# Altium PCB LCDTestor_LPC1788 - 副本.PcbDoc
Units mm, origin at the board's own origin, x right, y up, seen from the top; angles counter-clockwise.
Board outline 152.4 x 101.6 mm, 2 copper layers (Top Layer, Bottom Layer); 160 components, 269 nets, 828 pads, 23 vias.
Unrouted connection lines stored in the file: 488.
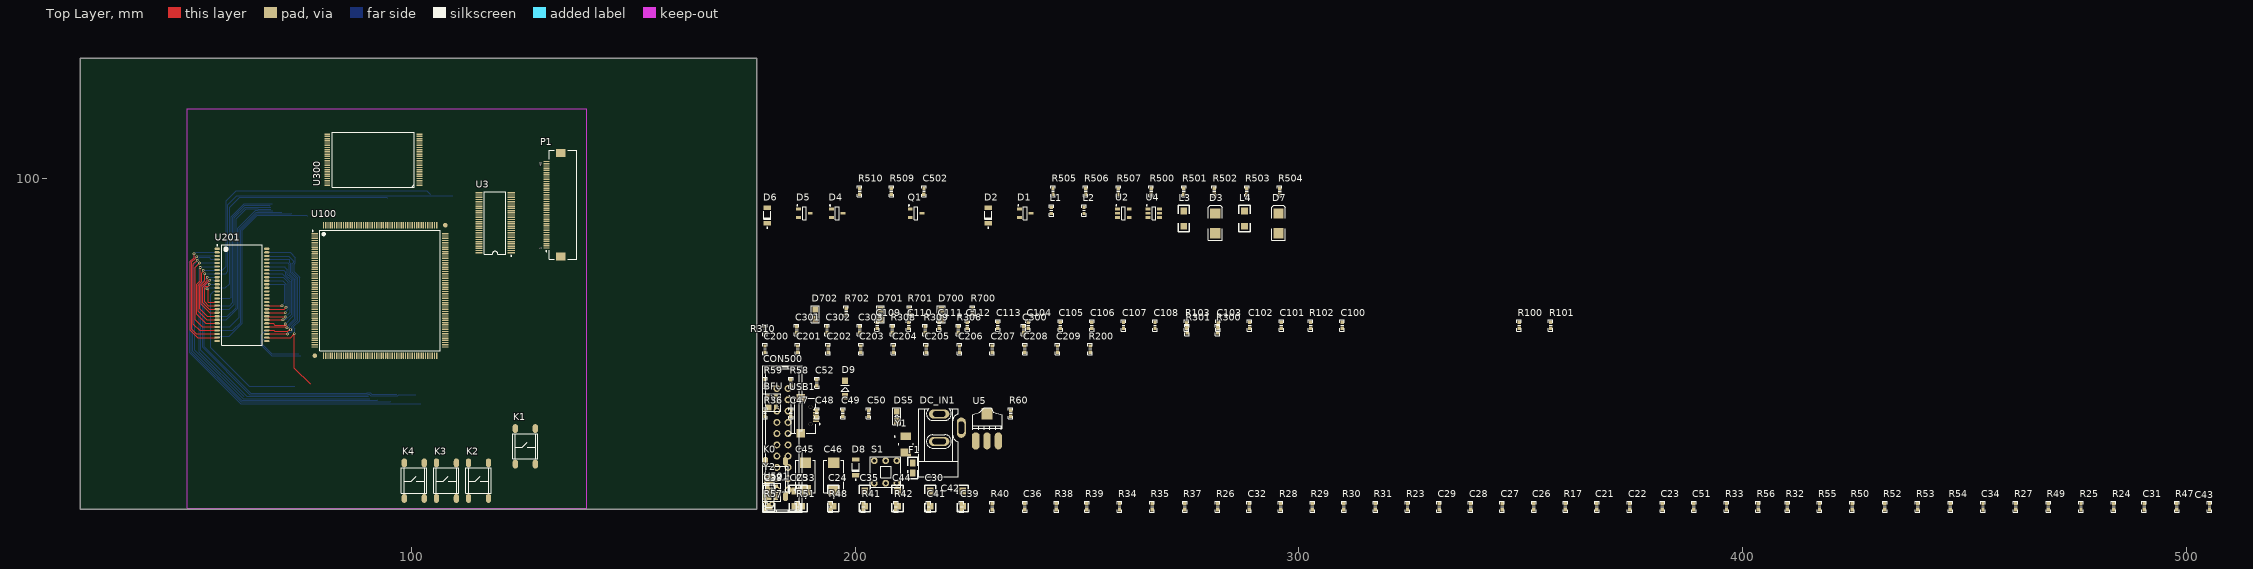
[diagram p0: Top Layer view]
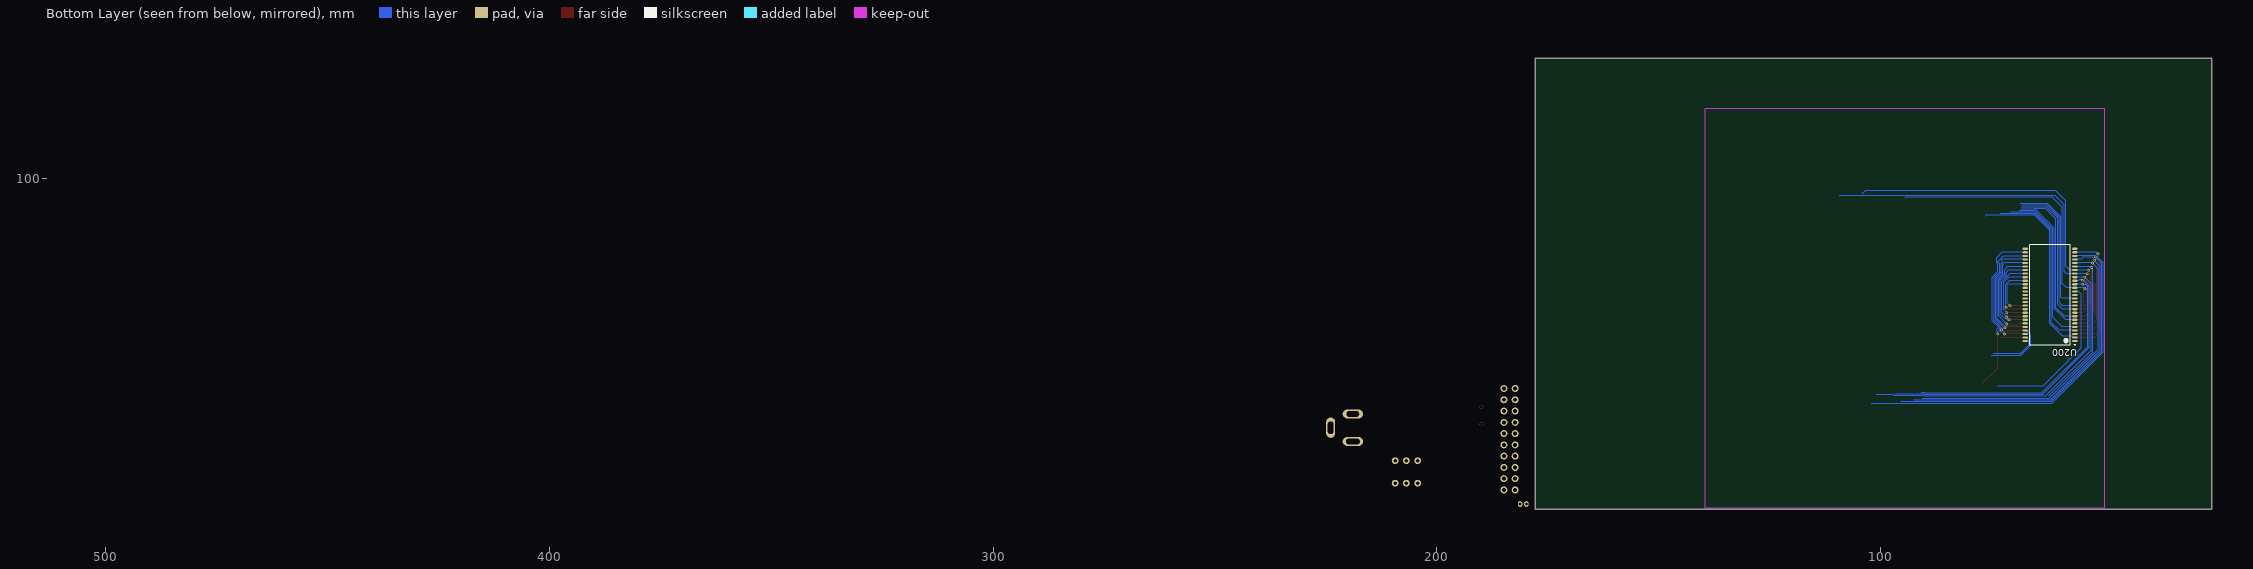
[diagram p1: Bottom Layer view, seen from below]

## Layer stack, top to bottom
Top Layer: signal copper 0.0356
Dielectric: dielectric 0.32, FR-4, Dk 4.8
Bottom Layer: signal copper 0.0356

## Board outline
25.4,25.4 177.8,25.4 177.8,127 25.4,127

## Design rules (kind name [scope] priority, off if disabled: settings)
Clearance [All] p1: gap=0.178
DiffPairsRouting [All] p1: maxlimit=0.254 minlimit=0.254 mostfreqgap=0.254 maxuncoupledlength=12.7
PolygonConnect [All] p1: connectstyle=Relief reliefconductorwidth=0.254 reliefentries=4 polygonreliefangle="90 Angle"
RoutingVias [All] p1: holewidth=0.3 width=0.6 viastyle="Through Hole" minholewidth=0.3 minwidth=0.6 maxholewidth=0.3 maxwidth=0.6
SilkscreenOverComponentPads [All] p1: minsilkscreentomaskgap=0.254
SolderMaskExpansion [All] p1: expansion=0.102
Width [All] p1: maxlimit=1.524 minlimit=0.127 preferedwidth=0.254
26 further rules are at their usual default settings.

## Classes and differential pairs
component class 11)KEY,LED: D700 D701 D702 K1 K2 K3 K4 R700 R701 R702
component class 07)Power,JTAG,RESET: C45 C46 C47 C48 C49 C50 C502 CON500 CT500 CT501 CT502 CT503 D8 D500 D501 DC_IN1 DS5 DW500 DW501 DW502 DW503 F1 K0 K500 R36 R60 R500 R501 R502 R503 R504 R505 R506 R507 R509 R510 S1 TP500 TP501 TP502 TP503 U5 U500 U501 U502
component class 05)NorFlash,NandFlash: C300 C301 C302 C303 JP300 R300 R301 R306 R308 R309 R310 U300 U301 U302
component class 06)LCD: C21 C22 C23 C24 C25 C26 C27 C28 C29 C30 C31 C32 C33 C34 C35 C36 C37 C38 C39 C41 C42 C43 C44 C51 C400 C402 C404 C406 C411 C414 C418 C420 C422 D1 D2 D3 D4 D5 D6 D7 L1 L2 L3 L4 P1 Q1 R17 R23 R24 R25 R26 R27 R28 R29 R30 R31 R32 R33 R34 R35 R37 R38 R39 R40 R41 R42 R47 R48 R49 R50 R51 R52 R53 R54 R55 R56 R57 U2 U3 U4
component class 04)SDRAM: C200 C201 C202 C203 C204 C205 C206 C207 C208 C209 C304 C305 C306 C307 C308 C309 JP1 R8 R9 R10 R11 R12 R13 R14 R15 R16 R200 U6 U200 U201 VD6 VD7
net class D[31..0]: D0 D1 D2 D3 D4 D5 D6 D7 D8 D9 D10 D11 D12 D13 D14 D15 D16 D17 D18 D19 D20 D21 D22 D23 D24 D25 D26 D27 D28 D29 D30 D31 D500 D501 D502 D503 D504 D505 D506
net class A[23..0]: A0 A1 A2 A3 A4 A5 A6 A7 A8 A9 A10 A11 A12 A13 A14 A15 A16 A17 A18 A19 A20 A21 A22 A23
component class 03)CPU-3: C100 C101 C102 C103 C104 C105 C106 C107 C108 C109 C110 C111 C112 C113 C210 C211 C212 C213 P0_5 R100 R101 R102 R103 R201 R202 R203 VD2 VD3 VD4 X1 Y1 Y2
component class 01)CPU-1: U100
net class VD[23..0]: VD2 VD3 VD4 VD5 VD6 VD7 VD10 VD11 VD12 VD13 VD14 VD15 VD18 VD19 VD20 VD21 VD22 VD23
component class "10)USB HOST,USB Device,": BFU C52 D9 R58 R59 USB1
differential pair RXIN3: +RXIN3_P -RXIN3_N
differential pair RXIN2: +RXIN2_P -RXIN2_N
differential pair RXIN1: +RXIN1_P -RXIN1_N
differential pair RXIN0: +RXIN0_P -RXIN0_N
differential pair RXCLKIN: +RXCLKIN_P -RXCLKIN_N
differential pair USB_D: +USB_D_P -USB_D_N

## Components (designator, comment, footprint, x,y, rotation, side; value= is the part's Value field where it differs from the comment)
BFU "SP0503" SOT143 181.229,49.403 r0 top
C21 "104" 0603P 367.157,25.908 r90 top
C22 "104" 0603P 374.523,25.908 r90 top
C23 "104" 0603P 381.889,25.908 r90 top
C24 "10uF/25V" 1206 195.072,26.035 r90 top
C25 "10uF/25V" 1206 186.436,26.035 r90 top
C26 "104" 0603P 352.933,25.908 r90 top
C27 "104" 0603P 345.821,25.908 r90 top
C28 "104" 0603P 338.709,25.908 r90 top
C29 "104" 0603P 331.597,25.908 r90 top
C30 "10uF/25V" 1206 216.916,26.035 r90 top
C31 "104" 0603P 490.474,25.908 r90 top
C32 "104" 0603P 288.798,25.908 r90 top
C33 "10uF/25V" 1206 187.96,26.035 r90 top
C34 "104" 0603P 454.152,25.908 r90 top
C35 "2.2uF/25V" 1206 202.184,26.035 r90 top
C36 "104" 0603P 238.252,25.908 r90 top
C37 "10uF/25V" 1206 180.594,26.035 r90 top
C38 "10uF/25V" 1206 180.594,26.035 r90 top
C39 "104" 0603P 224.028,25.908 r90 top
C41 "104" 0603P 216.535,25.908 r90 top
C42 "10uF/25V" 1206 224.282,26.035 r90 top
C43 "104" 0603P 505.206,25.908 r90 top
C44 "2.2uF/25V" 1206 209.55,26.035 r90 top
C45 "Cap Tantalum" 7343 188.849,32.766 r90 top
C46 "Cap Tantalum" 7343 195.199,32.766 r90 top
C47 "22uF" 0603P 185.547,46.99 r90 top
C48 "22uF" 0603P 191.389,46.99 r90 top
C49 "104" 0603P 197.231,46.99 r90 top
C50 "104" 0603P 203.073,46.99 r90 top
C51 "104" 0603P 389.001,25.908 r90 top
C52 "104" 0603P 191.389,53.848 r90 top
C100 "22P" 0603P 309.753,66.802 r90 top
C101 "22P" 0603P 296.037,66.802 r90 top
C102 "22P" 0603P 288.925,66.802 r90 top
C103 "22P" 0603P 281.813,66.802 r90 top
C104 "104" 0603P 239.014,66.802 r90 top
C105 "104" 0603P 246.253,66.802 r90 top
C106 "104" 0603P 253.365,66.802 r90 top
C107 "104" 0603P 260.477,66.802 r90 top
C108 "104" 0603P 267.589,66.802 r90 top
C109 "104" 0603P 204.978,66.802 r90 top
C110 "104" 0603P 212.09,66.802 r90 top
C111 "104" 0603P 218.948,66.802 r90 top
C112 "104" 0603P 225.298,66.802 r90 top
C113 "104" 0603P 232.156,66.802 r90 top
C200 "104" 0603P 179.705,61.468 r90 top
C201 "104" 0603P 187.071,61.468 r90 top
C202 "104" 0603P 193.929,61.468 r90 top
C203 "104" 0603P 201.295,61.468 r90 top
C204 "104" 0603P 208.661,61.468 r90 top
C205 "104" 0603P 216.027,61.468 r90 top
C206 "104" 0603P 223.52,61.468 r90 top
C207 "104" 0603P 230.886,61.468 r90 top
C208 "104" 0603P 238.252,61.468 r90 top
C209 "104" 0603P 245.618,61.468 r90 top
C300 "104" 0603P 237.998,65.786 r90 top
C301 "104" 0603P 186.817,65.786 r90 top
C302 "104" 0603P 193.675,65.786 r90 top
C303 "104" 0603P 201.041,65.786 r90 top
C502 "104" 0603P 215.519,97.028 r90 top
CON500 "JTAG_20Pin" JTAG_20 183.642,41.148 r90 top
D1 "BAV99" SOT-23-3L 238.379,92.075 r0 top
D2 "ZMM18" LL-34 229.997,91.567 r90 top
D3 "MBR0520" DSO-C2/X2.3 281.178,89.789 r90 top
D4 "BAV99" SOT-23-3L 195.961,92.075 r0 top
D5 "BAV99" SOT-23-3L 188.595,92.075 r0 top
D6 "ZMM10" LL-34 180.213,91.567 r90 top
D7 "MBR0520" DSO-C2/X2.3 295.402,89.789 r90 top
D8 "ZMM5V1" LL-34 200.152,34.798 r90 top
D9 "1N4148" DIODE_SOP 197.739,50.8 r90 top
D700 "LED" SMDLED 219.456,68.199 r90 top
D701 "LED" SMDLED 205.74,68.199 r90 top
D702 "LED" SMDLED 191.008,68.199 r90 top
DC_IN1 "POWER" DC10B 223.266,36.195 r90 top
DS5 "LED1" SMDLED 209.423,45.212 r90 top
F1 "Fuse 1" 0805 212.979,33.528 r90 top
K0 "KEY_M" K贴片 179.832,28.194 r0 top
K1 "KEY_M" K贴片 123.444,35.56 r0 top
K2 "KEY_M" K贴片 112.903,27.813 r0 top
K3 "KEY_M" K贴片 105.664,27.813 r0 top
K4 "KEY_M" K贴片 98.425,27.813 r0 top
L1 "Inductor" 0603P 244.221,92.71 r90 top
L2 "Inductor" 0603P 251.587,92.71 r90 top
L3 "Inductor" 1206 274.066,89.154 r90 top
L4 "Inductor" 1206 287.782,89.154 r90 top
P1 "MHDR2X20" FH12A-40S-0.5SH 132.08,93.98 r90 top
Q1 "2N3904" SOT-23-3L 213.741,92.075 r0 top
R17 "1.5K" 0603P 360.045,25.908 r90 top
R23 "10K" 0603P 324.485,25.908 r90 top
R24 "10K" 0603P 483.616,25.908 r90 top
R25 "100K  %1" 0603P 476.25,25.908 r90 top
R26 "10K" 0603P 281.686,25.908 r90 top
R27 "100K" 0603P 461.518,25.908 r90 top
R28 "10K" 0603P 295.91,25.908 r90 top
R29 "10K" 0603P 303.022,25.908 r90 top
R30 "10K" 0603P 310.134,25.908 r90 top
R31 "10K" 0603P 317.246,25.908 r90 top
R32 "0" 0603P 410.083,25.908 r90 top
R33 "12.4K  %1" 0603P 396.367,25.908 r90 top
R34 "10K" 0603P 259.588,25.908 r90 top
R35 "10K" 0603P 266.954,25.908 r90 top
R36 "0" 0603P 179.705,46.99 r90 top
R37 "10K" 0603P 274.32,25.908 r90 top
R38 "10K" 0603P 245.364,25.908 r90 top
R39 "0" 0603P 252.222,25.908 r90 top
R40 "10K" 0603P 230.886,25.908 r90 top
R41 "270R" 0603P 201.803,25.908 r90 top
R42 "10K" 0603P 209.169,25.908 r90 top
R47 "10K" 0603P 497.84,25.908 r90 top
R48 "10K" 0603P 194.437,25.908 r90 top
R49 "10K" 0603P 468.884,25.908 r90 top
R50 "0" 0603P 424.688,25.908 r90 top
R51 "10K" 0603P 187.071,25.908 r90 top
R52 "1.1" 0603P 432.054,25.908 r90 top
R53 "1.2" 0603P 439.42,25.908 r90 top
R54 "1.1" 0603P 446.786,25.908 r90 top
R55 "3K" 0603P 417.322,25.908 r90 top
R56 "82K" 0603P 403.479,25.908 r90 top
R57 "4.8K" 0603P 179.705,25.908 r90 top
R58 "22" 0603P 185.547,53.848 r90 top
R59 "22" 0603P 179.705,53.848 r90 top
R60 "1K" 0603P 235.077,46.99 r90 top
R100 "0R" 0603P 349.631,66.802 r90 top
R101 "0R" 0603P 356.743,66.802 r90 top
R102 "1M" 0603P 302.641,66.802 r90 top
R103 "0R" 0603P 274.701,66.802 r90 top
R200 "10K" 0603P 252.984,61.468 r90 top
R300 "10K" 0603P 281.686,65.786 r90 top
R301 "10K" 0603P 274.828,65.786 r90 top
R306 "4k7" 0603P 223.266,65.786 r90 top
R308 "4k7" 0603P 208.407,65.786 r90 top
R309 "4k7" 0603P 215.773,65.786 r90 top
R310 "4k7" 0603P 179.705,65.786 r90 top
R500 "10K" 0603P 266.7,97.028 r90 top
R501 "10K" 0603P 274.066,97.028 r90 top
R502 "10K" 0603P 280.924,97.028 r90 top
R503 "10K" 0603P 288.29,97.028 r90 top
R504 "10K" 0603P 295.656,97.028 r90 top
R505 "10K" 0603P 244.602,97.028 r90 top
R506 "10K" 0603P 251.968,97.028 r90 top
R507 "10K" 0603P 259.334,97.028 r90 top
R509 "10K" 0603P 208.153,97.028 r90 top
R510 "200R" 0603P 201.041,97.028 r90 top
R700 "100R" 0603P 226.441,69.977 r90 top
R701 "100R" 0603P 212.217,69.977 r90 top
R702 "100R" 0603P 197.993,69.977 r90 top
S1 "SW-SPDT" 自锁开关6 204.343,31.242 r0 top
U2 "MP1541DJ" SOT-23-5L 260.477,92.075 r0 top
U3 "SN75LVDS83B" DGG056 118.872,89.916 r90 top
U4 "MP3202DJ" SOT-23-6L 267.335,92.075 r0 top
U5 "AMS1117-3.3" AMS1117 227.203,40.767 r0 top
U100 "LPC1788" LQFP208_28X28X05P 92.964,74.676 r0 top
U200 "K4S561632D" 54_TSOP2_400AF_L 61.849,73.66 r0 bottom
U201 "K4S561632D" 54_TSOP2_400AF_L 61.849,73.66 r0 top
U300 "K9K1G08U0A" TSOP48 91.44,104.14 r180 top
U501 "MAX811T" SOT143 181.229,29.21 r0 top
USB1 "USB_Receptacle" Micro_USB 189.484,46.482 r0 top
Y1 "8MHz" SMD2_50X32 211.455,40.005 r0 top
Y2 "32.768K" XTAL32 179.832,26.543 r90 top

## Footprints (in the part's own frame and the unit in brackets; to place one, negate y for a bottom-side part, rotate by r counter-clockwise, add the part's x,y. Pads: shape width x height; smd on the part's side, far side on the other; paste and mask are expansions set on the pad)
54_TSOP2_400AF_L [mm] "SOP, 54-Leads, Body 22.5x10.16mm, Pitch 0.8mm, IPC High Density"
  oval 1.2x0.5 smd: 1(-5.6,10.4) 2(-5.6,9.6) 3(-5.6,8.8) 4(-5.6,8) 5(-5.6,7.2) 6(-5.6,6.4) 7(-5.6,5.6) 8(-5.6,4.8) 9(-5.6,4) 10(-5.6,3.2) 11(-5.6,2.4) 12(-5.6,1.6) 13(-5.6,0.8) 14(-5.6,0) 15(-5.6,-0.8) 16(-5.6,-1.6) 17(-5.6,-2.4) 18(-5.6,-3.2) 19(-5.6,-4) 20(-5.6,-4.8) 21(-5.6,-5.6) 22(-5.6,-6.4) 23(-5.6,-7.2) 24(-5.6,-8) 25(-5.6,-8.8) 26(-5.6,-9.6) 27(-5.6,-10.4) 28(5.6,-10.4) 29(5.6,-9.6) 30(5.6,-8.8) 31(5.6,-8) 32(5.6,-7.2) 33(5.6,-6.4) 34(5.6,-5.6) 35(5.6,-4.8) 36(5.6,-4) 37(5.6,-3.2) 38(5.6,-2.4) 39(5.6,-1.6) 40(5.6,-0.8) 41(5.6,0) 42(5.6,0.8) 43(5.6,1.6) 44(5.6,2.4) 45(5.6,3.2) 46(5.6,4) 47(5.6,4.8) 48(5.6,5.6) 49(5.6,6.4) 50(5.6,7.2) 51(5.6,8) 52(5.6,8.8) 53(5.6,9.6) 54(5.6,10.4)
  silkscreen extent -5.72,-11.3 4.6,11.32, body extent -5.08,-11.23 5.08,11.23, height 1.2
0603P [mil]
  rect 30x30 smd: 1(-27,0) 2(27.5,-0.06)
  silkscreen extent -50,-20 50,20
0805 [mil]
  rect 60x50 smd: 1(0,-0.06) 2(90,-0.06)
  silkscreen extent -50,-45 140,45
1206 [mil]
  rect 60x60 smd: 1(0,0) 2(135,0)
  silkscreen extent -50,-50 185,50
7343 [mm]
  rect 2.3x2.5 smd: 1(-3.1,0) 2(3.1,0)
  silkscreen extent -4.87,-2.2 3.65,2.2
AMS1117 [mil]
  oct 65x150 smd: 1(0.03,-0.06)
  oval 65x150 smd: 2(100.03,-0.06) 3(200.03,-0.06)
  rect 100x100 smd: 4(100.03,239.94)
  silkscreen extent -26,100 234,293
DC10B [mil]
  oval 80x180 hole 50 slot 110 at 90 deg: 1(419.09,170)
  oval 80x180 hole 50 slot 120 at 90 deg: 2(175,170)
  oval 180x80 hole 50 slot 110 at 0 deg: 3(297.05,-26.85)
  silkscreen extent -138,0 465,350
DGG056 [mm]
  rect 0.3x1.65 smd: 1(-6.75,-3.625) 2(-6.25,-3.625) 3(-5.75,-3.625) 4(-5.25,-3.625) 5(-4.75,-3.625) 6(-4.25,-3.625) 7(-3.75,-3.625) 8(-3.25,-3.625) 9(-2.75,-3.625) 10(-2.25,-3.625) 11(-1.75,-3.625) 12(-1.25,-3.625) 13(-0.75,-3.625) 14(-0.25,-3.625) 15(0.25,-3.625) 16(0.75,-3.625) 17(1.25,-3.625) 18(1.75,-3.625) 19(2.25,-3.625) 20(2.75,-3.625) 21(3.25,-3.625) 22(3.75,-3.625) 23(4.25,-3.625) 24(4.75,-3.625) 25(5.25,-3.625) 26(5.75,-3.625) 27(6.25,-3.625) 28(6.75,-3.625) 29(6.75,3.625) 30(6.25,3.625) 31(5.75,3.625) 32(5.25,3.625) 33(4.75,3.625) 34(4.25,3.625) 35(3.75,3.625) 36(3.25,3.625) 37(2.75,3.625) 38(2.25,3.625) 39(1.75,3.625) 40(1.25,3.625) 41(0.75,3.625) 42(0.25,3.625) 43(-0.25,3.625) 44(-0.75,3.625) 45(-1.25,3.625) 46(-1.75,3.625) 47(-2.25,3.625) 48(-2.75,3.625) 49(-3.25,3.625) 50(-3.75,3.625) 51(-4.25,3.625) 52(-4.75,3.625) 53(-5.25,3.625) 54(-5.75,3.625) 55(-6.25,3.625) 56(-6.75,3.625)
  silkscreen extent -7.57,-3.75 7.05,2.4
DIODE_SOP [mm]
  rect 1.5x1.3 smd: 1(0,0) 2(3.556,0)
  silkscreen extent 1.14,-1.02 2.56,1.02
DSO-C2/X2.3 [mm] "DO-214-AA/SMB; 2 C-Bend Leads; Body 5.3 x 3.6 mm, inc. leads (LxW)"
  rect 2.3x2.3 smd: 1(-2.25,0) 2(2.25,0)
  silkscreen extent -3.8,-1.55 4.1,1.55
FH12A-40S-0.5SH [mm]
  rect 0.3x1.3 smd: 1(-9.75,1.625) 2(-9.25,1.625) 3(-8.75,1.625) 4(-8.25,1.625) 5(-7.75,1.625) 6(-7.25,1.625) 7(-6.75,1.625) 8(-6.25,1.625) 9(-5.75,1.625) 10(-5.25,1.625) 11(-4.75,1.625) 12(-4.25,1.625) 13(-3.75,1.625) 14(-3.25,1.625) 15(-2.75,1.625) 16(-2.25,1.625) 17(-1.75,1.625) 18(-1.25,1.625) 19(-0.75,1.625) 20(-0.25,1.625) 21(0.25,1.625) 22(0.75,1.625) 23(1.25,1.625) 24(1.75,1.625) 25(2.25,1.625) 26(2.75,1.625) 27(3.25,1.625) 28(3.75,1.625) 29(4.25,1.625) 30(4.75,1.625) 31(5.25,1.625) 32(5.75,1.625) 33(6.25,1.625) 34(6.75,1.625) 35(7.25,1.625) 36(7.75,1.625) 37(8.25,1.625) 38(8.75,1.625) 39(9.25,1.625) 40(9.75,1.625)
  rect 1.8x2.2 smd: 41(-11.65,-1.625) 42(11.65,-1.625)
  silkscreen extent -12.25,-5.2 12.25,1.75
JTAG_20 [mil]
  round 62 hole 35: 1(-450,-50) 2(-450,50) 3(-350,-50) 4(-350,50) 5(-250,-50) 6(-250,50) 7(-150,-50) 8(-150,50) 9(-50,-50) 10(-50,50) 11(50,-50) 12(50,50) 13(150,-50) 14(150,50) 15(250,-50) 16(250,50) 17(350,-50) 18(350,50) 19(450,-50) 20(450,50)
  silkscreen extent -650,-175 650,175
K贴片 [mm]
  oval 1.2x2 smd: 1(0,0) 1(0,8) 2(4.5,0) 2(4.5,8)
  silkscreen extent -0.64,1.14 5.08,6.86
LL-34 [mm]
  rect 0.95x1.65 smd: 1(-1.75,0) 2(1.75,0)
  silkscreen extent -2.87,-0.75 0.9,0.75
LQFP208_28X28X05P [mm]
  oval 1.5x0.3 smd: 1(-14.7,12.75) 2(-14.7,12.25) 3(-14.7,11.75) 4(-14.7,11.25) 5(-14.7,10.75) 6(-14.7,10.25) 7(-14.7,9.75) 8(-14.7,9.25) 9(-14.7,8.75) 10(-14.7,8.25) 11(-14.7,7.75) 12(-14.7,7.25) 13(-14.7,6.75) 14(-14.7,6.25) 15(-14.7,5.75) 16(-14.7,5.25) 17(-14.7,4.75) 18(-14.7,4.25) 19(-14.7,3.75) 20(-14.7,3.25) 21(-14.7,2.75) 22(-14.7,2.25) 23(-14.7,1.75) 24(-14.7,1.25) 25(-14.7,0.75) 26(-14.7,0.25) 27(-14.7,-0.25) 28(-14.7,-0.75) 29(-14.7,-1.25) 30(-14.7,-1.75) 31(-14.7,-2.25) 32(-14.7,-2.75) 33(-14.7,-3.25) 34(-14.7,-3.75) 35(-14.7,-4.25) 36(-14.7,-4.75) 37(-14.7,-5.25) 38(-14.7,-5.75) 39(-14.7,-6.25) 40(-14.7,-6.75) 41(-14.7,-7.25) 42(-14.7,-7.75) 43(-14.7,-8.25) 44(-14.7,-8.75) 45(-14.7,-9.25) 46(-14.7,-9.75) 47(-14.7,-10.25) 48(-14.7,-10.75) 49(-14.7,-11.25) 50(-14.7,-11.75) 51(-14.7,-12.25) 52(-14.7,-12.75) 105(14.7,-12.75) 106(14.7,-12.25) 107(14.7,-11.75) 108(14.7,-11.25) 109(14.7,-10.75) 110(14.7,-10.25) 111(14.7,-9.75) 112(14.7,-9.25) 113(14.7,-8.75) 114(14.7,-8.25) 115(14.7,-7.75) 116(14.7,-7.25) 117(14.7,-6.75) 118(14.7,-6.25) 119(14.7,-5.75) 120(14.7,-5.25) 121(14.7,-4.75) 122(14.7,-4.25) 123(14.7,-3.75) 124(14.7,-3.25) 125(14.7,-2.75) 126(14.7,-2.25) 127(14.7,-1.75) 128(14.7,-1.25) 129(14.7,-0.75) 130(14.7,-0.25) 131(14.7,0.25) 132(14.7,0.75) 133(14.7,1.25) 134(14.7,1.75) 135(14.7,2.25) 136(14.7,2.75) 137(14.7,3.25) 138(14.7,3.75) 139(14.7,4.25) 140(14.7,4.75) 141(14.7,5.25) 142(14.7,5.75) 143(14.7,6.25) 144(14.7,6.75) 145(14.7,7.25) 146(14.7,7.75) 147(14.7,8.25) 148(14.7,8.75) 149(14.7,9.25) 150(14.7,9.75) 151(14.7,10.25) 152(14.7,10.75) 153(14.7,11.25) 154(14.7,11.75) 155(14.7,12.25) 156(14.7,12.75)
  oval 0.3x1.5 smd: 53(-12.75,-14.7) 54(-12.25,-14.7) 55(-11.75,-14.7) 56(-11.25,-14.7) 57(-10.75,-14.7) 58(-10.25,-14.7) 59(-9.75,-14.7) 60(-9.25,-14.7) 61(-8.75,-14.7) 62(-8.25,-14.7) 63(-7.75,-14.7) 64(-7.25,-14.7) 65(-6.75,-14.7) 66(-6.25,-14.7) 67(-5.75,-14.7) 68(-5.25,-14.7) 69(-4.75,-14.7) 70(-4.25,-14.7) 71(-3.75,-14.7) 72(-3.25,-14.7) 73(-2.75,-14.7) 74(-2.25,-14.7) 75(-1.75,-14.7) 76(-1.25,-14.7) 77(-0.75,-14.7) 78(-0.25,-14.7) 79(0.25,-14.7) 80(0.75,-14.7) 81(1.25,-14.7) 82(1.75,-14.7) 83(2.25,-14.7) 84(2.75,-14.7) 85(3.25,-14.7) 86(3.75,-14.7) 87(4.25,-14.7) 88(4.75,-14.7) 89(5.25,-14.7) 90(5.75,-14.7) 91(6.25,-14.7) 92(6.75,-14.7) 93(7.25,-14.7) 94(7.75,-14.7) 95(8.25,-14.7) 96(8.75,-14.7) 97(9.25,-14.7) 98(9.75,-14.7) 99(10.25,-14.7) 100(10.75,-14.7) 101(11.25,-14.7) 102(11.75,-14.7) 103(12.25,-14.7) 104(12.75,-14.7) 157(12.75,14.7) 158(12.25,14.7) 159(11.75,14.7) 160(11.25,14.7) 161(10.75,14.7) 162(10.25,14.7) 163(9.75,14.7) 164(9.25,14.7) 165(8.75,14.7) 166(8.25,14.7) 167(7.75,14.7) 168(7.25,14.7) 169(6.75,14.7) 170(6.25,14.7) 171(5.75,14.7) 172(5.25,14.7) 173(4.75,14.7) 174(4.25,14.7) 175(3.75,14.7) 176(3.25,14.7) 177(2.75,14.7) 178(2.25,14.7) 179(1.75,14.7) 180(1.25,14.7) 181(0.75,14.7) 182(0.25,14.7) 183(-0.25,14.7) 184(-0.75,14.7) 185(-1.25,14.7) 186(-1.75,14.7) 187(-2.25,14.7) 188(-2.75,14.7) 189(-3.25,14.7) 190(-3.75,14.7) 191(-4.25,14.7) 192(-4.75,14.7) 193(-5.25,14.7) 194(-5.75,14.7) 195(-6.25,14.7) 196(-6.75,14.7) 197(-7.25,14.7) 198(-7.75,14.7) 199(-8.25,14.7) 200(-8.75,14.7) 201(-9.25,14.7) 202(-9.75,14.7) 203(-10.25,14.7) 204(-10.75,14.7) 205(-11.25,14.7) 206(-11.75,14.7) 207(-12.25,14.7) 208(-12.75,14.7)
  round 1 smd: 209(-14.7,-14.7) 210(14.7,14.7)
  silkscreen extent -15.32,-13.6 13.6,13.6
Micro_USB [mm]
  rect 1.35x0.4 smd: 1(1.679,1.3) 2(1.679,0.65) 3(1.679,0) 4(1.679,-0.65) 5(1.679,-1.3)
  rect 1.9x1.9 smd: 6(-1.679,-3.95) ""(-1.679,3.95)
  silkscreen extent -4.46,-4.57 2.64,4.57
SMD2_50X32 [mm]
  rect 2.4x1.7 smd: 1(0,1.85) 2(0,-1.85)
  silkscreen extent -2.62,-0.25 1.6,1.87
SMDLED [mm]
  rect 1.4x1.27 smd: 1(0.001,-0.002) 2(2.211,-0.002)
  silkscreen extent -0.8,-0.89 3.01,0.89
SOT143 [mm]
  rect 1.35x1.35 smd: 1(-0.75,-1.1)
  rect 0.9x1.35 smd: 2(0.95,-1.1) 3(0.95,1.1) 4(-0.95,1.1)
  silkscreen extent -2,-2 2,2
SOT-23-3L [mm]
  rect 1.1x0.6 smd: 1(-1.3,0.95) 2(-1.3,-0.95) 3(1.3,0)
  silkscreen extent -1.72,-1.45 0.43,1.87
SOT-23-5L [mm]
  rect 1.1x0.6 smd: 1(-1.3,0.95) 2(-1.3,0) 3(-1.3,-0.95) 4(1.3,-0.95) 5(1.3,0.95)
  silkscreen extent -1.72,-1.45 0.43,1.87
SOT-23-6L [mm]
  rect 1.1x0.6 smd: 1(-1.3,0.95) 2(-1.3,0) 3(-1.3,-0.95) 4(1.3,-0.95) 5(1.3,0) 6(1.3,0.95)
  silkscreen extent -1.72,-1.45 0.43,1.87
TSOP48 [mm] "TSOP48"
  rect 1.295x0.305 smd: 1(-10.4,5.75) 2(-10.4,5.25) 3(-10.4,4.75) 4(-10.4,4.25) 5(-10.4,3.75) 6(-10.4,3.25) 7(-10.4,2.75) 8(-10.4,2.25) 9(-10.4,1.75) 10(-10.4,1.25) 11(-10.4,0.75) 12(-10.4,0.25) 13(-10.4,-0.25) 14(-10.4,-0.75) 15(-10.4,-1.25) 16(-10.4,-1.75) 17(-10.4,-2.25) 18(-10.4,-2.75) 19(-10.4,-3.25) 20(-10.4,-3.75) 21(-10.4,-4.25) 22(-10.4,-4.75) 23(-10.4,-5.25) 24(-10.4,-5.75) 25(10.4,-5.75) 26(10.4,-5.25) 27(10.4,-4.75) 28(10.4,-4.25) 29(10.4,-3.75) 30(10.4,-3.25) 31(10.4,-2.75) 32(10.4,-2.25) 33(10.4,-1.75) 34(10.4,-1.25) 35(10.4,-0.75) 36(10.4,-0.25) 37(10.4,0.25) 38(10.4,0.75) 39(10.4,1.25) 40(10.4,1.75) 41(10.4,2.25) 42(10.4,2.75) 43(10.4,3.25) 44(10.4,3.75) 45(10.4,4.25) 46(10.4,4.75) 47(10.4,5.25) 48(10.4,5.75)
  silkscreen extent -9.23,-6.2 9.2,6.2
XTAL32 [mil]
  oval 50x40 hole 28: 1(0,0) 2(0,-56)
  rect 92.13x86 smd: ""(220,-27)
  silkscreen extent -28,-77 264,25
自锁开关6 [mil]
  round 60 hole 30: 1(0,0) 2(100,0) 3(200,0) 4(200,200) 5(100,200) 6(0,200)
  silkscreen extent -35,-35 235,235

## Part data
BFU: "Capacitor"
C21 C22 C23 C24 C25 C26 C27 C28 C29 C30 C31 C32 C33 C34 C35 C36 C37 C38 C39 C41 C42 C43 C44 C51: library part C
C45 C46: "Polarized Capacitor (Surface Mount)"
C47 C48 C49 C50 C52: library part C_2
C100 C101 C102 C103 C104 C105 C106 C107 C108 C109 C110 C111 C112 C113 C200 C201 C202 C203 C204 C205 C206 C207 C208 C209 C300 C301 C302 C303: library part C_Generic_Dup2
C502: library part C_Generic_Dup1
D2 D6 D8: library part "D Zener", "Zener Diode"
D3 D7: library part "D Schottky", "Schottky Diode"
D9: library part D
DC_IN1: library part POW
DS5: library part LED2, "Typical RED, GREEN, YELLOW, AMBER GaAs LED"
F1: "Fuse"
P1: "Header, 20-Pin, Dual row"
Q1: "NPN General Purpose Amplifier"
R17 R23 R24 R25 R26 R27 R28 R29 R30 R31 R32 R33 R34 R35 R36 R37 R38 R39 R40 R41 R42 R47 R48 R49 R50 R51 R52 R53 R54 R55 R56 R57 R58 R59 R60: library part R
R100 R101 R102 R103 R700 R701 R702: library part R_Generic_Dup2
R200 R300 R301 R306 R308 R309 R310 R500 R501 R502 R503 R504 R505 R506 R507 R509 R510: library part R_Generic_Dup1
S1: "SPDT Subminiature Toggle Switch, Right Angle Mounting, Vertical Actuation"
U2: library part MP1541
U4: library part MP3202
U5: library part AMS1117
U501: library part UD215_1
USB1: library part 300008272, "B型USB插座，Series “B” Receptacles，Right Angle, T/H，4POS"
Y1: library part XTAL, "Crystal Oscillator"
Y2: library part XTAL_1, "Crystal Oscillator"

## Via types
v1: diameter 0.6, hole 0.3, Top Layer to Bottom Layer, 21 vias
v2: diameter 0.8, hole 0.8, Top Layer to Bottom Layer, 2 vias

## Nets (pads, with @x,y where several pads share a name; then routed paths per layer and width w, separated by ;. In a path a pad name is that pad's centre, name@x,y a point inside that pad or via, vN(x,y) a via of type N, cw(c..) or ccw(c..) an arc to the next point about the centre after c; other vN are vias at no path point)
+3V3: C21.2 C22.2 C23.2 C46.1 C48.2 C49.2 C50.2 C104.1 C105.1 C106.1 C107.1 C108.1 C109.1 C110.1 C111.1 C112.1 C113.1 C200.1 C201.1 C202.1 C203.1 C204.1 C205.1 C206.1 C207.1 C208.1 C209.1 C300.1 C301.1 C302.1 C303.1 L1.2 L2.2 R28.2 R29.1 R30.1 R31.2 R40.1 R48.1 R57.1 R100.2 R101.2 R200.2 R300.2 R301.1 R306.1 R308.1 R309.1 R509.1 U3.1 U3.9 U3.26 U5.2 U5.4 U100.15 U100.26 U100.60 U100.71 U100.86 U100.89 U100.112 U100.125 U100.146 U100.165 U100.174 U100.181 U100.198 U200.1 U200.3 U200.9 U200.14 U200.27 U200.43 U200.49 U201.1 U201.3 U201.9 U201.14 U201.27 U201.43 U201.49 U300.12 U300.37 U501.4
A0: U100.75 U200.23 U201.23 | length 87
  Top Layer w0.178: v1(52.285,80.86) 51.275,79.85 51.275,68.105 52.92,66.46 U201.23
  Bottom Layer w0.178: U200.23 v1(52.285,80.86) 51.054,79.629 51.054,61.341 62.103,50.292 90.678,50.292
A1: U100.79 U200.24 U201.24 | length 92.9
  Top Layer w0.178: v1(51.765,81.483) 50.919,80.637 50.919,67.038 52.298,65.66 U201.24
  Bottom Layer w0.178: U200.24 54.865,81.66 54.421,82.104 52.386,82.104 v1(51.765,81.483) 51.765,81.229 50.698,80.162 50.698,61.062 61.824,49.936 92.354,49.936 92.456,50.038
A2: U100.83 U200.25 U201.25 | length 99.3
  Top Layer w0.178: v1(51.689,82.296) 51.41,82.017 51.41,81.929 50.564,81.083 50.564,65.895 51.599,64.86 U201.25
  Bottom Layer w0.178: U200.25 51.853,82.46 v1(51.689,82.296) 51.689,82.208 50.343,80.862 50.343,60.914 61.676,49.581 95.301,49.581 95.377,49.657
A3: U100.97 U200.26 U201.26 | length 109.1
  Top Layer w0.178: v1(51.054,82.931) 51.054,82.076 50.208,81.23 50.208,65.743 51.891,64.06 U201.26
  Bottom Layer w0.178: U200.26 51.383,83.26 v1(51.054,82.931) 51.054,82.076 49.987,81.01 49.987,60.767 61.605,49.149 102.108,49.149
A4: U100.103 U200.29 U201.29 | length 44.7
  Top Layer w0.178: U201.29 72.823,64.06 v1(73.66,64.897) 73.66,57.15 77.216,53.594
  Bottom Layer w0.178: U200.29 72.696,83.26 73.863,82.093 73.863,80.858 73.584,80.579 73.584,78.913 74.811,77.685 74.811,67.841 73.447,66.477 73.447,66.417 73.693,66.17 73.693,64.93 v1(73.66,64.897)
A5: U100.107 U200.30 U201.30 | length 29.8
  Top Layer w0.178: U201.30 v1(72.099,64.86)
  Bottom Layer w0.178: U200.30 67.486,82.423 72.385,82.423 73.508,81.3 73.508,81.006 73.228,80.726 73.228,78.765 74.455,77.538 74.455,67.989 73.091,66.624 73.091,66.269 73.338,66.023 73.338,65.551 73.006,65.219 72.419,65.219 72.099,64.899 v1(72.099,64.86)
A6: U100.113 U200.31 U201.31 | length 28
  Top Layer w0.178: U201.31 68.96,65.66 69.193,65.427 72.158,65.427 72.645,65.914 72.771,65.788 v1(72.771,65.786)
  Bottom Layer w0.178: U200.31 72.645,81.66 72.645,80.893 72.873,80.665 72.873,78.618 74.1,77.391 74.1,68.136 72.645,66.681 72.645,65.912 v1(72.771,65.786)
A7: U100.121 U200.32 U201.32 | length 25.4
  Top Layer w0.178: U201.32 71.921,66.46 72.009,66.372 v1(72.009,66.294)
  Bottom Layer w0.178: U200.32 72.175,80.86 72.517,80.518 72.517,78.471 73.744,77.244 73.744,68.283 71.921,66.46 72.009,66.372 v1(72.009,66.294)
A8: U100.127 U200.33 U201.33 | length 23.5
  Top Layer w0.178: U201.33 68.884,67.26 69.283,66.861 71.823,66.861 v1(71.578,67.106)
  Bottom Layer w0.178: U200.33 71.578,80.06 71.578,79.801 72.085,79.294 72.085,78.273 72.304,78.054 72.431,78.054 73.388,77.096 73.388,68.916 v1(71.578,67.106)
A9: U100.131 U200.34 U201.34 | length 20.7
  Top Layer w0.178: U201.34 v1(71.108,68.06)
  Bottom Layer w0.178: U200.34 71.235,79.26 71.73,78.765 71.73,78.125 72.156,77.699 72.283,77.699 73.033,76.949 73.033,69.31 71.863,68.14 71.188,68.14 v1(71.108,68.06)
A10: U100.135 U200.22 U201.22 | length 53.5
  Top Layer w0.178: v1(52.43,79.862) 52.43,76.827 51.63,76.028 51.63,69.274 53.644,67.26 U201.22
  Bottom Layer w0.178: U200.22 56.199,80.01 52.578,80.01 v1(52.43,79.862) 52.248,79.68 52.248,60.782 62.23,50.8
A11: U100.145 U200.35 U201.35 | length 18.6
  Top Layer w0.178: U201.35 67.602,68.707 v1(71.628,68.707)
  Bottom Layer w0.178: U200.35 70.892,78.46 72.677,76.675 72.677,69.756 v1(71.628,68.707)
A12: U100.149 U200.36 U201.36 | length 16.6
  Top Layer w0.178: U201.36 v1(71.565,69.66)
  Bottom Layer w0.178: U200.36 71.184,77.66 72.322,76.522 72.322,70.417 v1(71.565,69.66)
A13: U100.155 U200.20 U201.20 | length 84.9
  Top Layer w0.178: v1(53.442,78.461) 53.442,76.839 53.192,76.589 53.192,76.584 52.342,75.734 52.342,70.594 54.076,68.86 U201.20
  Bottom Layer w0.178: v1(53.442,78.461) U200.20 ; U200.20 58.14,78.46 58.674,78.994 58.674,93.98 60.706,96.012 109.347,96.012
A14: U100.159 U200.21 U201.21 | length 82.4
  Top Layer w0.178: v1(53.086,79.248) 53.086,78.906 52.837,78.657 52.837,76.732 51.986,75.881 51.986,69.934 53.86,68.06 U201.21
  Bottom Layer w0.178: v1(53.086,79.248) 53.098,79.26 U200.21 57.416,79.26 58.293,80.137 58.293,94.869 60.579,97.155 103.505,97.155 104.267,96.393
A15: U100.173
A16: U100.101
A17: U100.104
A18: U100.105
A19: U100.111 U300.17
A20: U100.109 U300.16
A21: U100.115
A22: U100.123
A23: U100.129
AVDD: C33.2 C35.1 D3.2 D4.1 P1.27 R25.2
BL_DIM: R56.1
BL_EN: R32.1 R39.1 R50.1
CAN_RD1: U100.94
CAN_TD1: U100.96
CS1#: R309.2 U100.193
D0: U100.197 U200.2 U300.29 | length 44.1
  Bottom Layer w0.178: U200.2 56.532,64.343 59.004,64.343 61.925,67.264 61.925,88.204 65.313,91.592 76.429,91.592 76.581,91.44
D1: U100.201 U200.4 U300.30 | length 40
  Bottom Layer w0.178: U200.4 59.818,65.66 61.57,67.412 61.57,88.351 65.166,91.948 72.898,91.948 73.025,92.075
D2: U100.207 U200.5 U300.31 | length 37
  Bottom Layer w0.178: U200.5 59.094,66.46 61.214,68.58 61.214,88.499 65.019,92.304 70.841,92.304 70.866,92.329
D3: U100.3 U200.7 U300.32 | length 33.3
  Bottom Layer w0.178: U200.7 58.276,68.06 60.858,70.643 60.858,88.646 64.976,92.763 65.27,92.763 65.374,92.659 68.758,92.659
D4: U100.13 U200.8 U300.41 | length 34
  Bottom Layer w0.178: U200.8 58.573,68.86 60.503,70.79 60.503,90.861 62.761,93.119 65.418,93.119 65.522,93.015 68.367,93.015
D5: U100.17 U200.10 U300.42 | length 33.1
  Bottom Layer w0.178: U200.10 59.03,70.46 60.147,71.577 60.147,91.008 62.614,93.475 65.565,93.475 65.669,93.37 68.219,93.37 68.321,93.472
D6: U100.23 U200.11 U300.43 | length 32.5
  Bottom Layer w0.178: U200.11 59.068,71.26 59.792,71.984 59.792,91.166 62.456,93.83 67.968,93.83 68.072,93.726
D7: U100.27 U200.13 U300.44 | length 31.8
  Bottom Layer w0.178: U200.13 59.144,72.86 59.436,73.152 59.436,91.313 62.309,94.186 68.501,94.186 68.58,94.107
D8: U100.191 U200.42
D9: U100.199 U200.44
D10: U100.205 U200.45
D11: U100.208 U200.47
D12: U100.1 U200.48
D13: U100.7 U200.50
D14: R306.2 U100.21 U200.51 | length 13.8
  Bottom Layer w0.178: U200.51 67.166,65.377 66.885,65.377 66.227,64.718 66.227,62.297 68.58,59.944 75.057,59.944
D15: R310.1 U100.28 U200.53 | length 11.1
  Bottom Layer w0.178: U200.53 67.168,64.06 66.582,63.474 66.582,62.45 68.58,60.452 74.676,60.452
D16: U100.137 U201.2
D17: U100.143 U201.4
D18: U100.151 U201.5
D19: U100.161 U201.7
D20: U100.167 U201.8
D21: U100.175 U201.10
D22: U100.195 U201.11
D23: U100.65 U201.13
D24: U100.58 U201.42
D25: U100.56 U201.44
D26: U100.55 U201.45
D27: U100.203 U201.47
D28: U100.5 U201.48
D29: U100.11 U201.50
D30: U100.19 U201.51
D31: U100.25 U201.53
D_N: BFU.3 R58.1 USB1.2
D_P: BFU.4 R59.1 USB1.3
DAC_OUT: U100.12
DQM0: U100.49 U200.15 | length 36.2
  Bottom Layer w0.178: U200.15 55.537,74.46 54.864,73.787 54.864,61.722 63.5,53.086 73.787,53.086
DQM1: U100.43 U200.39
DQM2: U100.31 U201.15
DQM3: U100.39 U201.39
DYCS0#: R200.1 U100.73 U200.19 U201.19 | length 72.5
  Top Layer w0.178: v1(54.039,77.66) 54.039,76.933 53.548,76.442 53.548,76.437 52.697,75.586 52.697,71.509 54.546,69.66 U201.19
  Bottom Layer w0.178: U200.19 v1(54.039,77.66) 52.603,76.224 52.603,61.189 62.967,50.825 90.322,50.825 90.424,50.927
EMC_CAS#: U100.87 U200.17 U201.17 | length 72.6
  Top Layer w0.178: v1(54.47,76.06) 54.47,75.801 54.293,75.624 53.74,75.624 53.408,75.292 53.408,72.073 54.221,71.26 U201.17
  Bottom Layer w0.178: U200.17 v1(54.47,76.06) 53.835,76.06 53.34,75.565 53.34,61.971 63.774,51.537 90.028,51.537 90.129,51.638 90.719,51.638 91.049,51.308 96.774,51.308
EMC_CKE0: U100.53 U200.37 U201.37 | length 14.5
  Top Layer w0.178: U201.37 71.349,70.46 v1(71.755,70.866)
  Bottom Layer w0.178: U200.37 71.09,76.86 71.857,76.093 71.857,70.968 v1(71.755,70.866)
EMC_CLK0: U100.59 U200.38 U201.38 | length 12.5
  Top Layer w0.178: U201.38 v1(70.879,71.26)
  Bottom Layer w0.178: U200.38 71.387,76.06 71.501,75.946 71.501,71.882 v1(70.879,71.26)
EMC_CS2#: U100.91
EMC_CS3#: U100.99
EMC_RAS#: U100.95 U200.18 U201.18 | length 80.3
  Top Layer w0.178: v1(54.61,76.962) 54.275,76.627 54.235,76.627 53.903,76.295 53.903,76.29 53.053,75.439 53.053,71.926 54.518,70.46 U201.18
  Bottom Layer w0.178: U200.18 55.474,76.86 55.245,77.089 54.483,77.089 v1(54.61,76.962) 54.234,76.962 52.959,75.687 52.959,61.849 63.627,51.181 90.175,51.181 90.277,51.283 90.571,51.283 90.901,50.952 96.921,50.952 97.15,51.181 100.965,51.181
EMC_WE#: U100.179 U200.16 U201.16 U300.18 | length 64.4
  Top Layer w0.178: v1(53.975,75.057) 54.28,74.752 54.28,72.06 U201.16
  Bottom Layer w0.178: v1(53.975,75.057) 54.178,75.26 U200.16 58.115,75.26 59.08,76.225 59.08,93.37 61.341,95.631 94.488,95.631 94.615,95.504
ENET_CRS_DV: U100.190
ENET_MDC: U100.180
ENET_MDIO: U100.178
ENET_REF_CLK: U100.182
ENET_RX_ER: U100.184
ENET_RXD0: U100.188
ENET_RXD1: U100.186
ENET_TX_EN#: U100.192
ENET_TXD0: U100.196
ENET_TXD1: U100.194
GND: BFU.1 C21.1 C22.1 C23.1 C24.2 C25.2 C27.2 C28.1 C29.1 C30.2 C34.1 C35.2 C36.1 C37.1 C38.1 C41.1 C42.2 C43.1 C44.2 C45.2 C46.2 C47.1 C48.1 C49.1 C50.1 C51.1 C52.1 D2.1 D5.2 D6.2 D8.1 DC_IN1.2 DC_IN1.3 DS5.2 K1.1 K2.1 K3.1 K4.1 P1.9 P1.12 P1.15 P1.18 P1.21 P1.24 P1.26 P1.28 P1.33 R33.1 R34.2 R35.2 R37.2 R38.2 R42.2 R51.2 R52.2 R53.2 R54.2 U2.2 U3.5 U3.13 U3.21 U3.29 U3.33 U3.35 U3.36 U3.43 U3.49 U3.53 U4.2 U5.1 USB1.4 USB1.5 USB1.6
GND_POWER: C100.2 C101.2 C102.2 C103.2 C104.2 C105.2 C106.2 C107.2 C108.2 C109.2 C110.2 C111.2 C112.2 C113.2 C200.2 C201.2 C202.2 C203.2 C204.2 C205.2 C206.2 C207.2 C208.2 C209.2 C300.2 C301.2 C302.2 C303.2 C502.2 CON500.4 CON500.6 CON500.8 CON500.10 CON500.12 CON500.14 CON500.16 CON500.18 CON500.20 D700.2 D701.2 D702.2 K0.2 R103.2 R310.2 R505.2 R506.2 R507.2 U100.32 U100.33 U100.63 U100.77 U100.84 U100.93 U100.114 U100.133 U100.148 U100.169 U100.172 U100.189 U100.200 U200.6 U200.12 U200.28 U200.41 U200.46 U200.52 U200.54 U201.6 U201.12 U201.28 U201.41 U201.46 U201.52 U201.54 U300.13 U300.36 U501.1
I2C0_SCL: U100.48
I2C0_SDA: U100.50
L/R: P1.7 R28.1 R37.1
LCD_DCLK: U100.150
LCD_DCLK: U3.31
LCD_EN: U100.142
LCD_EN: U3.30
LCD_FP: U100.144
LCD_FP: U3.28
LCD_LE: U100.152
LCD_LP: U100.140
LCD_LP: U3.27
LED+: C44.1 D7.2 P1.39 P1.40 U4.5
LED-: P1.35 P1.36 R49.2 R52.1 R53.1 R54.1
NetBFU_2: BFU.2 C52.2 D9.1 USB1.1
NetC24_1: C24.1 D1.2 R17.2
NetC26_1: C26.1 D1.3
NetC28_2: C28.2 L1.1 U3.34
NetC29_2: C29.2 L2.1 U3.44
NetC32_2: C32.2 D4.3
NetC33_1: C33.1 D1.1 D4.2
NetC34_2: C34.2 R24.2 R32.2 U2.4
NetC37_2: C37.2 D5.1 R41.2
NetC39_2: C39.2 D5.3
NetC51_2: C51.2 R55.1 R56.2
NetC100_1: C100.1 R102.2 U100.34 Y1.2
NetC101_1: C101.1 R102.1 U100.36 Y1.1
NetC102_1: C102.1 U100.44 Y2.1
NetC103_1: C103.1 U100.46 Y2.2
NetC502_1: C502.1 K0.1 R36.1 R509.2 U501.3
NetCON500_11: CON500.11 R503.2
NetCON500_17: CON500.17 R506.1
NetCON500_19: CON500.19 R507.1
NetD7_1: D7.1 L4.2 U4.1
NetD700_1: D700.1 R700.2
NetD701_1: D701.1 R701.2
NetD702_1: D702.1 R702.2
NetDC_IN1_1: DC_IN1.1 S1.2
NetDS5_1: DS5.1 R60.2
NetF1_1: F1.1 S1.3
NetQ1_1: Q1.1 R23.2 R26.1
NetR25_1: R25.1 R27.2 R33.2
NetR26_2: R26.2 R34.1
NetR27_1: R27.1 U2.3
NetR47_2: R47.2 R50.2 U4.4
NetR48_2: R48.2 R51.1 U3.17
NetR49_1: R49.1 R55.2 U4.3
NetR57_2: R57.2 U3.32
NetR100_1: R100.1 U100.24
NetR101_1: R101.1 U100.20
NetR103_1: R103.1 U100.22
NetR300_1: R300.1 U300.7
NetR301_2: R301.2 U300.19
NetR510_1: R510.1 U501.2
NNAND_CS#: R308.2 U100.187 U300.9
NNAND_RE#: U100.183 U300.8
NRST: CON500.15 R36.2 R510.2 U100.35
P0_4: U3.51 U100.168
P0_5: U3.52 U100.166
P0_12: U100.41
P0_23: U100.18
P0_24: U100.16
P0_25: U100.14
P1_12: R700.1 U100.157
P1_13: R701.1 U100.147
P1_18: U100.66
P1_31: U100.40
P2_10: U100.110
P2_11: K1.2 U100.108
P2_19: K2.2 U100.67
P2_21: K3.2 U100.81
P2_25: K4.2 U100.54
P4_26: U100.119
P4_27: U100.139
P5_0: U100.9
P5_1: U100.30
P5_2: U100.117
PWM0_1: U100.185
PWM0_2: U100.177
PWM0_3: U100.156
PWM0_4: U100.171
PWM0_5: U100.153
PWM0_6: U100.163
PWM1_1: U100.154
RESET: C36.2 P1.5 R29.2
RSTOUT#: U100.29
RSVD: U3.25
RTC_ALARM_MVT: R702.1 U100.37
RXCLKIN_N: P1.10 U3.40
RXCLKIN_P: P1.11 U3.39
RXIN0_N: P1.13 U3.48
RXIN0_P: P1.14 U3.47
RXIN1_N: P1.16 U3.46
RXIN1_P: P1.17 U3.45
RXIN2_N: P1.19 U3.42
RXIN2_P: P1.20 U3.41
RXIN3_N: P1.22 U3.38
RXIN3_P: P1.23 U3.37
SELB: P1.25 R40.2 R42.1
SSP0_MISO: U100.57
SSP0_MOSI: U100.47
SSP0_SCK: U100.85
SSP0_SSEL: U100.64
STBYB: P1.8 R31.1 R39.2
SW: C26.2 C32.1 C39.1 D3.1 L3.2 U2.1
TCK(SWDCLK): CON500.9 R505.1 U100.10
TDI: CON500.5 R501.2 U100.4
TDO(SWO): CON500.13 R504.2 U100.2
TMS(SWDIO): CON500.7 R502.2 U100.6
TRST#: CON500.3 R500.2 U100.8
U0_RXD: U100.204
U0_TXD: U100.202
U1_CTS: U100.126
U1_DCD: U100.124
U1_DSR: U100.122
U1_DTR: U100.120
U1_RI: U100.118
U1_RTS: U100.116
U1_RXD: U100.130
U1_TXD: U100.128
U2_OE: U100.68
U2_RXD: U100.100
U2_TXD: U100.98
U4_RXD: U100.141
U4_TXD: U100.206
U/D: P1.6 R30.2 R38.1
USB_CONNECT: U100.69
USB_D_D2+: U100.51 U100.52
USB_D_N: R58.2 U100.62
USB_D_P: R59.2 U100.61
USB_LED: U100.45
USB_VBUS: U100.42
VCC5V: C30.1 C31.2 C42.1 C43.2 C45.1 C47.2 D8.2 D9.2 F1.2 L3.1 L4.1 Q1.3 R23.1 R24.1 R47.1 R60.1 U2.5 U4.6 U5.3
VCC_3V3: CON500.1 CON500.2 R500.1 R501.1 R502.1 R503.1 R504.1
VCC_RTC: U100.38
VCOM: P1.1 Q1.2 R35.1
VD2: U100.170
VD2: U3.54
VD3: U100.176
VD3: U3.55
VD4: U100.138
VD4: U3.56
VD5: U100.136
VD5: U3.3
VD6: U100.134
VD6: U3.50
VD7: U100.132
VD7: U3.2
VD8: U3.4 U100.164
VD9: U3.6 U100.162
VD10: U100.70
VD10: U3.7
VD11: U100.72
VD11: U3.11
VD12: U100.74
VD12: U3.12
VD13: U100.76
VD13: U3.14
VD14: U100.78
VD14: U3.8
VD15: U100.80
VD15: U3.10
VD16: U3.15 U100.160
VD17: U3.19 U100.158
VD18: U100.106
VD18: U3.20
VD19: U100.102
VD19: U3.22
VD20: U100.82
VD20: U3.23
VD21: U100.88
VD21: U3.24
VD22: U100.90
VD22: U3.16
VD23: U100.92
VD23: U3.18
VDD: P1.2 P1.3
VGH: C25.1 C27.1 D2.2 P1.29 R17.1
VGL: C38.2 C41.2 D6.1 P1.32 R41.1
pads on no net: C31.1 P1.4 P1.30 P1.31 P1.34 P1.37 P1.38 P1.41 P1.42 S1.1 S1.4 S1.5 S1.6 U100.209 U100.210 U200.40 U201.40 U300.1 U300.2 U300.3 U300.4 U300.5 U300.6 U300.10 U300.11 U300.14 U300.15 U300.20 U300.21 U300.22 U300.23 U300.24 U300.25 U300.26 U300.27 U300.28 U300.33 U300.34 U300.35 U300.38 U300.39 U300.40 U300.45 U300.46 U300.47 U300.48 USB1. Y2.
copper on no net:
  other v2: 189.955,44.482 189.955,48.482

## Keep-outs
Keep-Out Layer:
  lines w0.254: 49.53,25.57 139.53,25.57 139.53,115.57 49.53,115.57 49.53,25.57

## Text inside footprints (layer, text, board x,y; h text height)
BFU: Top Overlay "3" at 181.102,49.911 h0.51; Top Overlay "2" at 182.626,48.006 h0.51; Top Overlay "1" at 179.508,47.733 h0.51; Top Overlay "4" at 180.975,50.673 h0.51
C45: Mechanical 1 "C1" at 189.299,32.229 h0.51 r90
C46: Mechanical 1 "C1" at 195.649,32.229 h0.51 r90
D1: Mechanical 1 "U1" at 238.739,91.661 h0.51 r90
D4: Mechanical 1 "U1" at 196.321,91.661 h0.51 r90
D5: Mechanical 1 "U1" at 188.955,91.661 h0.51 r90
P1: Top Overlay "1" at 129.355,83.98 h0.51 r90; Top Overlay "40" at 129.355,102.63 h0.51 r90
Q1: Mechanical 1 "U1" at 214.101,91.661 h0.51 r90
U2: Mechanical 15 "1" at 260.927,91.911 h0.75 r90
U4: Mechanical 15 "1" at 267.785,91.911 h0.75 r90
U300: Mechanical 8 "1" at 102.214,98.447 h0.25 r180; Mechanical 8 "2" at 102.214,98.947 h0.25 r180; Mechanical 8 "20" at 102.418,107.947 h0.25 r180; Mechanical 8 "21" at 102.418,108.447 h0.25 r180; Mechanical 8 "22" at 102.418,108.947 h0.25 r180; Mechanical 8 "23" at 102.418,109.447 h0.25 r180; Mechanical 8 "24" at 102.418,109.947 h0.25 r180; Mechanical 8 "25" at 81.618,109.947 h0.25 r180; Mechanical 8 "26" at 81.618,109.447 h0.25 r180; Mechanical 8 "27" at 81.618,108.947 h0.25 r180; Mechanical 8 "28" at 81.618,108.447 h0.25 r180; Mechanical 8 "33" at 81.618,105.947 h0.25 r180; Mechanical 8 "3" at 102.214,99.447 h0.25 r180; Mechanical 8 "34" at 81.618,105.447 h0.25 r180; Mechanical 8 "35" at 81.618,104.947 h0.25 r180; Mechanical 8 "38" at 81.618,103.447 h0.25 r180; Mechanical 8 "39" at 81.618,102.947 h0.25 r180; Mechanical 8 "40" at 81.618,102.447 h0.25 r180; Mechanical 8 "45" at 81.618,99.947 h0.25 r180; Mechanical 8 "46" at 81.618,99.447 h0.25 r180; Mechanical 8 "47" at 81.618,98.947 h0.25 r180; Mechanical 8 "48" at 81.618,98.447 h0.25 r180; Mechanical 8 "4" at 102.214,99.947 h0.25 r180; Mechanical 8 "5" at 102.214,100.447 h0.25 r180; Mechanical 8 "6" at 102.214,100.947 h0.25 r180; Mechanical 8 "10" at 102.418,102.947 h0.25 r180; Mechanical 8 "11" at 102.418,103.447 h0.25 r180; Mechanical 8 "14" at 102.418,104.947 h0.25 r180; Mechanical 8 "15" at 102.418,105.447 h0.25 r180; Mechanical 8 "9" at 102.214,102.447 h0.25 r180; Mechanical 8 "8" at 102.214,101.947 h0.25 r180; Mechanical 8 "18" at 102.418,106.947 h0.25 r180; Mechanical 8 "17" at 102.418,106.447 h0.25 r180; Mechanical 8 "16" at 102.418,105.947 h0.25 r180; Mechanical 8 "19" at 102.418,107.447 h0.25 r180; Mechanical 8 "42" at 81.618,101.447 h0.25 r180; Mechanical 8 "31" at 81.618,106.947 h0.25 r180; Mechanical 8 "43" at 81.618,100.947 h0.25 r180; Mechanical 8 "30" at 81.618,107.447 h0.25 r180; Mechanical 8 "41" at 81.618,101.947 h0.25 r180; Mechanical 8 "32" at 81.618,106.447 h0.25 r180; Mechanical 8 "44" at 81.618,100.447 h0.25 r180; Mechanical 8 "29" at 81.618,107.947 h0.25 r180; Mechanical 8 "13" at 102.418,104.447 h0.25 r180; Mechanical 8 "36" at 81.618,104.447 h0.25 r180; Mechanical 8 "12" at 102.418,103.947 h0.25 r180; Mechanical 8 "37" at 81.618,103.947 h0.25 r180; Mechanical 8 "7" at 102.214,101.447 h0.25 r180
U501: Top Overlay "4" at 180.975,30.48 h0.51; Top Overlay "1" at 179.508,27.54 h0.51; Top Overlay "2" at 182.626,27.813 h0.51; Top Overlay "3" at 181.102,29.718 h0.51